# EAGLE board sensor_Ilham Widyo Nugroho (SM) (EAGLE 7.3.0)
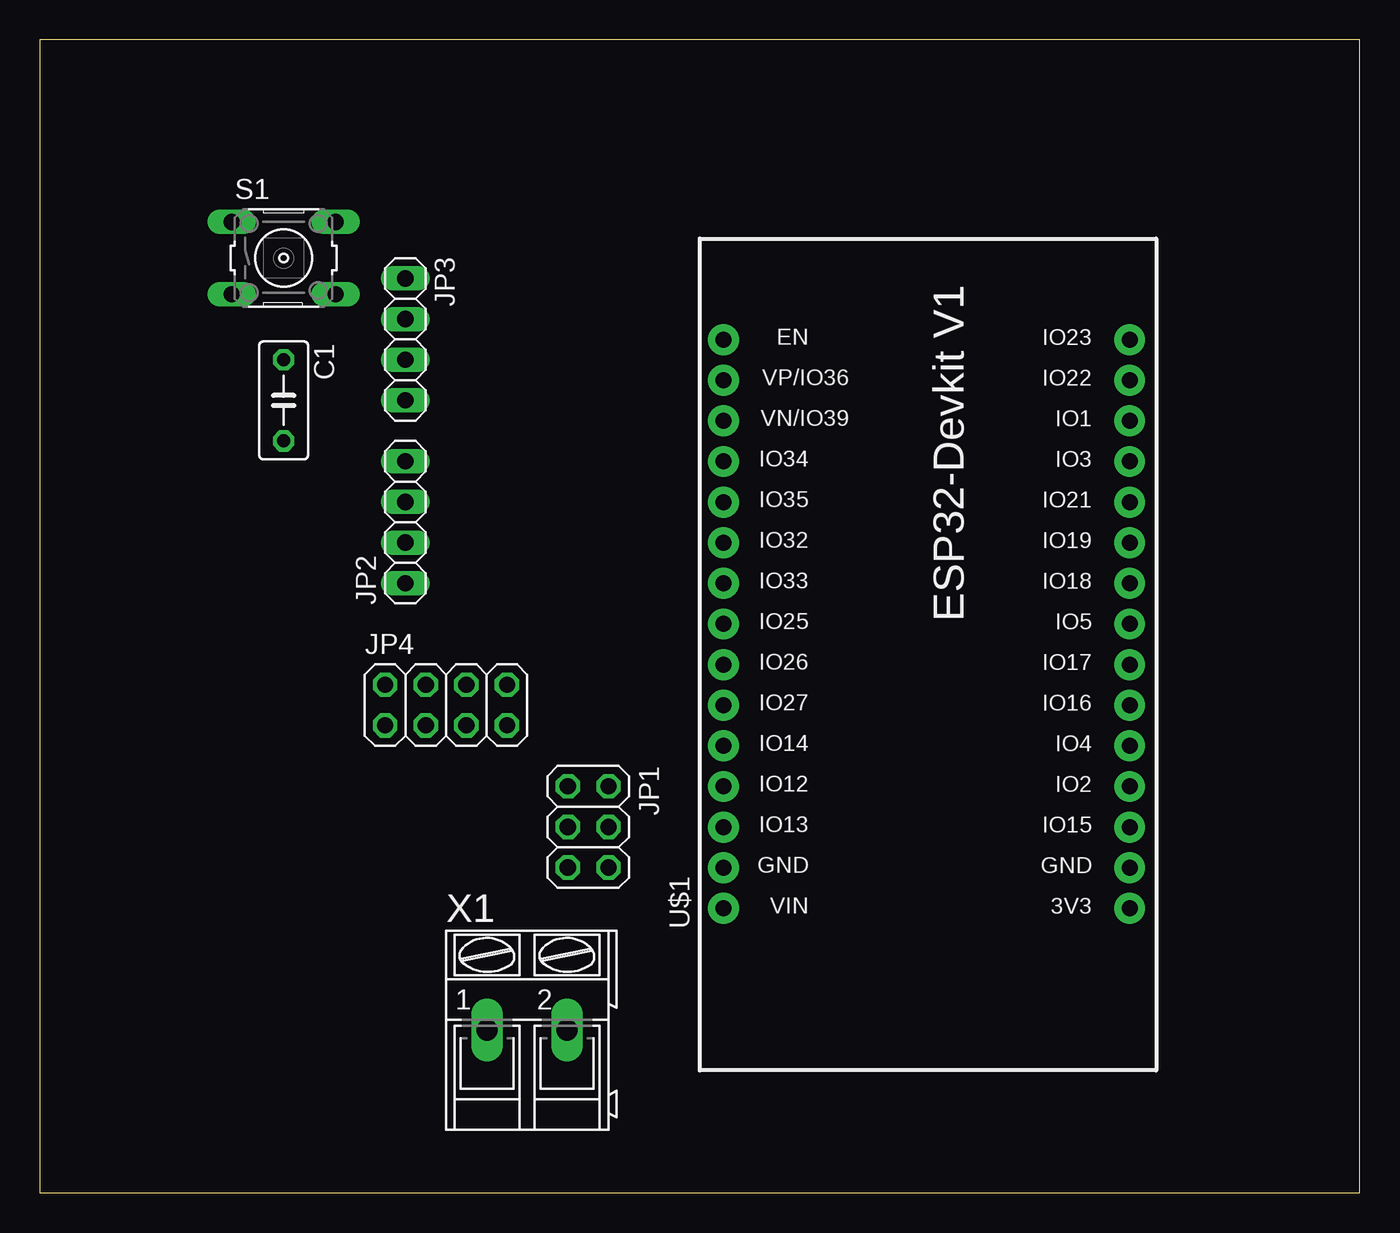
[diagram p0: board, top side]
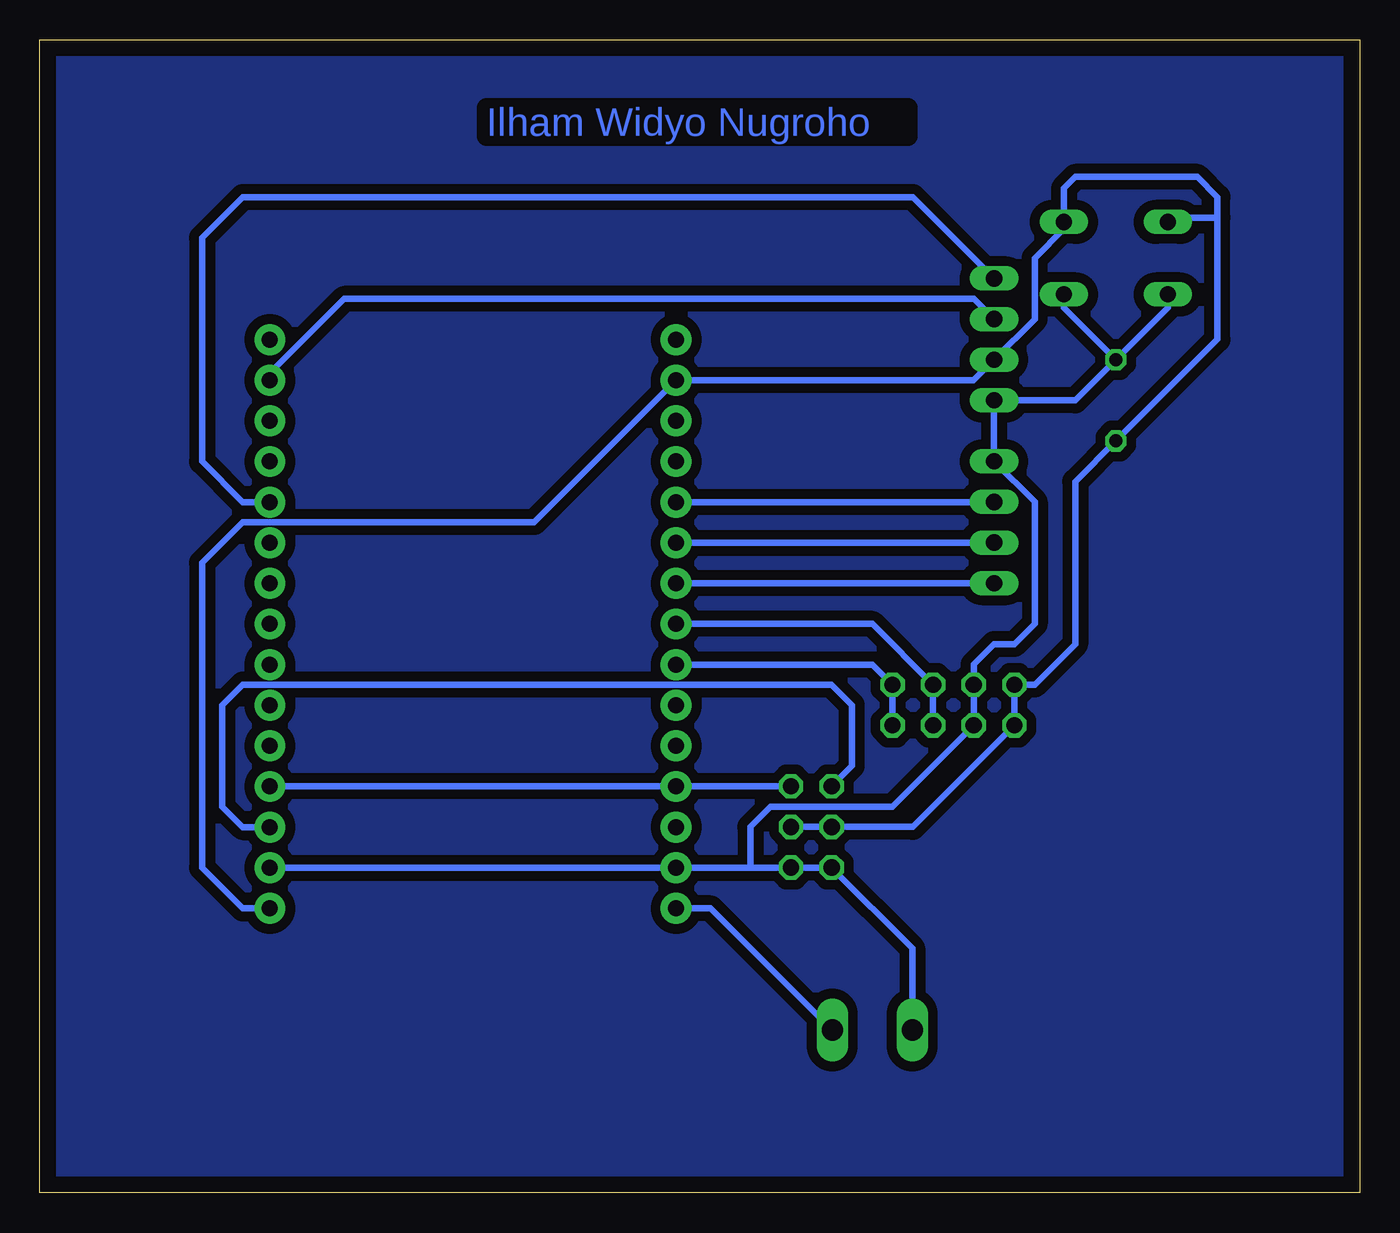
[diagram p1: board, bottom side, seen from below]

Size 82.53 x 72.06 mm. Coordinates in mm from the lower left corner, seen from the top.
Outline: 0,0 82.53,0 82.53,72.06 0,72.06 0,0
Copper layers (1*16): Top 0.035mm / dielectric 1.5mm / Bottom 0.035mm
Design rules "default": minimum track width 6mil, minimum drill 0.35mm, track to track 6mil, track to pad 6mil, pad to pad 6mil, via to via 6mil, smd to smd 6mil, copper to edge 40mil, drill to drill 6mil, minimum pad ring 10mil, minimum via ring 8mil, stop-mask expansion 4mil, vias tented up to drill 0mil, thermal gap 10mil

## Footprints (pad centres in the part's own frame; a part is rotated, then mirrored left to right if it is on the bottom)
C050-030X075 = drill 0.813 octagon: 1 -2.54,0; 2 2.54,0
2X03 = drill 1.016 octagon: 1 -2.54,-1.27; 2 -2.54,1.27; 3 0,-1.27; 4 0,1.27; 5 2.54,-1.27; 6 2.54,1.27
1X04 = drill 1.016 long: 1 -3.81,0; 2 -1.27,0; 3 1.27,0; 4 3.81,0
2X04 = drill 1.016 octagon: 1 -3.81,-1.27; 2 -3.81,1.27; 3 -1.27,-1.27; 4 -1.27,1.27; 5 1.27,-1.27; 6 1.27,1.27; 7 3.81,-1.27; 8 3.81,1.27
B3F-10XX = drill 1.016 long: 1 -3.251,2.261; 2 3.251,2.261; 3 -3.251,-2.261; 4 3.251,-2.261
ESP32-DEVKITV1 = drill 1 pad 1.93: 3V3 -16.52,-12.27; D1 13.96,-12.27; D2 -8.9,-12.27; D3 11.42,-12.27; D4 -6.36,-12.27; D5 1.26,-12.27; D12 -8.9,13.135; D13 -11.44,13.135; D14 -6.36,13.135; D15 -11.44,-12.27; D16 -3.82,-12.27; D17 -1.28,-12.27; D18 3.8,-12.27; D19 6.34,-12.27; D21 8.88,-12.27; D22 16.5,-12.27; D23 19.04,-12.27; D25 1.26,13.135; D26 -1.28,13.135; D27 -3.82,13.135; D32 6.34,13.135; D33 3.8,13.135; D34 11.42,13.135; D35 8.88,13.135; D36 16.5,13.135; D39 13.96,13.135; EN 19.04,13.135; GND@1 -13.98,13.135; GND@2 -13.98,-12.27; VIN -16.52,13.135
AK300/2 = drill 1.321 long: 1 -2.515,0; 2 2.489,0

## Placement (x,y rotation side)
C1  [C050-030X075]  15.24,49.53 270 top
JP1  [2X03]  34.29,22.86 270 top
JP2  [1X04]  22.86,41.91 90 top
JP3  [1X04]  22.86,53.34 270 top
JP4  [2X04]  25.4,30.48 0 top
S1  [B3F-10XX]  15.24,58.42 0 top
U$1  ESP32DEVKITV1  [ESP32-DEVKITV1]  55.88,34.29 90 top
X1  [AK300/2]  30.48,10.16 0 top

## Library data of the parts
C1 = rcl; SPICEPREFIX: C
JP1-JP4 = pinhead
S1 = switch-omron; MPN: B3F-1000; OC_FARNELL: 176432; OC_NEWARK: 36M3542
U$1 = esp32-devkitv1
X1 = con-ptr500; OC_FARNELL: unknown; OC_NEWARK: unknown

## Nets
GND: C1.1 JP1.5 JP1.6 JP2.4 JP3.4 JP4.3 JP4.4 S1.3 S1.4 U$1.GND@1 U$1.GND@2 X1.1
MOISTURE: JP1.2 U$1.D2
OUT1: JP2.1 U$1.D33
OUT2: JP2.2 U$1.D32
OUT3: JP2.3 U$1.D35
PH: JP1.1 U$1.D15
SCL: JP3.2 U$1.D22
SCL2: JP4.5 JP4.6 U$1.D25
SDA: JP3.1 U$1.D21
SDA2: JP4.7 JP4.8 U$1.D26
V: C1.2 JP1.3 JP1.4 JP3.3 JP4.1 JP4.2 S1.1 S1.2 U$1.3V3 U$1.D36
VIN: U$1.VIN X1.2

## Tracks (layer width: path | path; a pad name or v marks a point on that pad's centre or on a via)
GND
  Bottom 0.406: C1.1 17.78,49.53 JP3.4 JP2.4 20.32,43.18 20.32,35.56 21.59,34.29 22.86,34.29 24.13,33.02 JP4.4 JP4.3 29.21,24.13 36.83,24.13 38.1,22.86 38.1,20.32 | C1.1 11.99,55.32 S1.3 | C1.1 18.49,55.32 S1.4 | 38.1,20.32 U$1.GND@1 U$1.GND@2 | 38.1,20.32 JP1.6 JP1.5 27.97,15.26 X1.1
MOISTURE
  Bottom 0.406: JP1.2 U$1.D2
N$1
  pour Bottom (isolate 0.61): 0,72.39 0,0 82.55,0 82.55,72.39
OUT1
  Bottom 0.406: JP2.1 U$1.D33
OUT2
  Bottom 0.406: U$1.D32 JP2.2
OUT3
  Bottom 0.406: JP2.3 U$1.D35
PH
  Bottom 0.406: JP1.1 31.75,26.67 31.75,30.48 33.02,31.75 69.85,31.75 71.12,30.48 71.12,24.13 69.84,22.85 U$1.D15
SCL
  Bottom 0.406: JP3.2 24.13,55.88 63.5,55.88 68.15,51.23 U$1.D22
SCL2
  Bottom 0.406: U$1.D25 30.47,35.55 JP4.6 JP4.5
SDA
  Bottom 0.406: JP3.1 27.94,62.23 69.85,62.23 72.39,59.69 72.39,45.72 69.84,43.17 U$1.D21
SDA2
  Bottom 0.406: U$1.D26 30.47,33.01 JP4.8 JP4.7
V
  Bottom 0.406: 8.89,60.96 8.89,53.34 C1.2 17.78,44.45 17.78,34.29 20.32,31.75 JP4.2 JP4.1 27.94,22.86 JP1.3 JP1.4 | 8.89,60.96 8.89,62.23 10.16,63.5 17.78,63.5 18.49,62.79 S1.2 18.49,60.25 20.32,58.42 20.32,54.61 JP3.3 24.14,50.79 U$1.D36 51.62,41.91 69.85,41.91 72.39,39.37 72.39,20.32 69.84,17.77 U$1.3V3 | S1.1 11.71,60.96 8.89,60.96
VIN
  Bottom 0.406: X1.2 40.58,17.77 U$1.VIN

## Text on the board
Bottom: Ilham Widyo Nugroho